# Altium PCB PCB1.PcbDoc (part 4 of 4)
Units mil, origin at the board's own origin, x right, y up, seen from the top; angles counter-clockwise.
Board outline 5315 x 3730 mil, 2 copper layers (Top Layer, Bottom Layer); 713 components, 554 nets, 2458 pads, 0 vias.
Unrouted connection lines stored in the file: 1728.
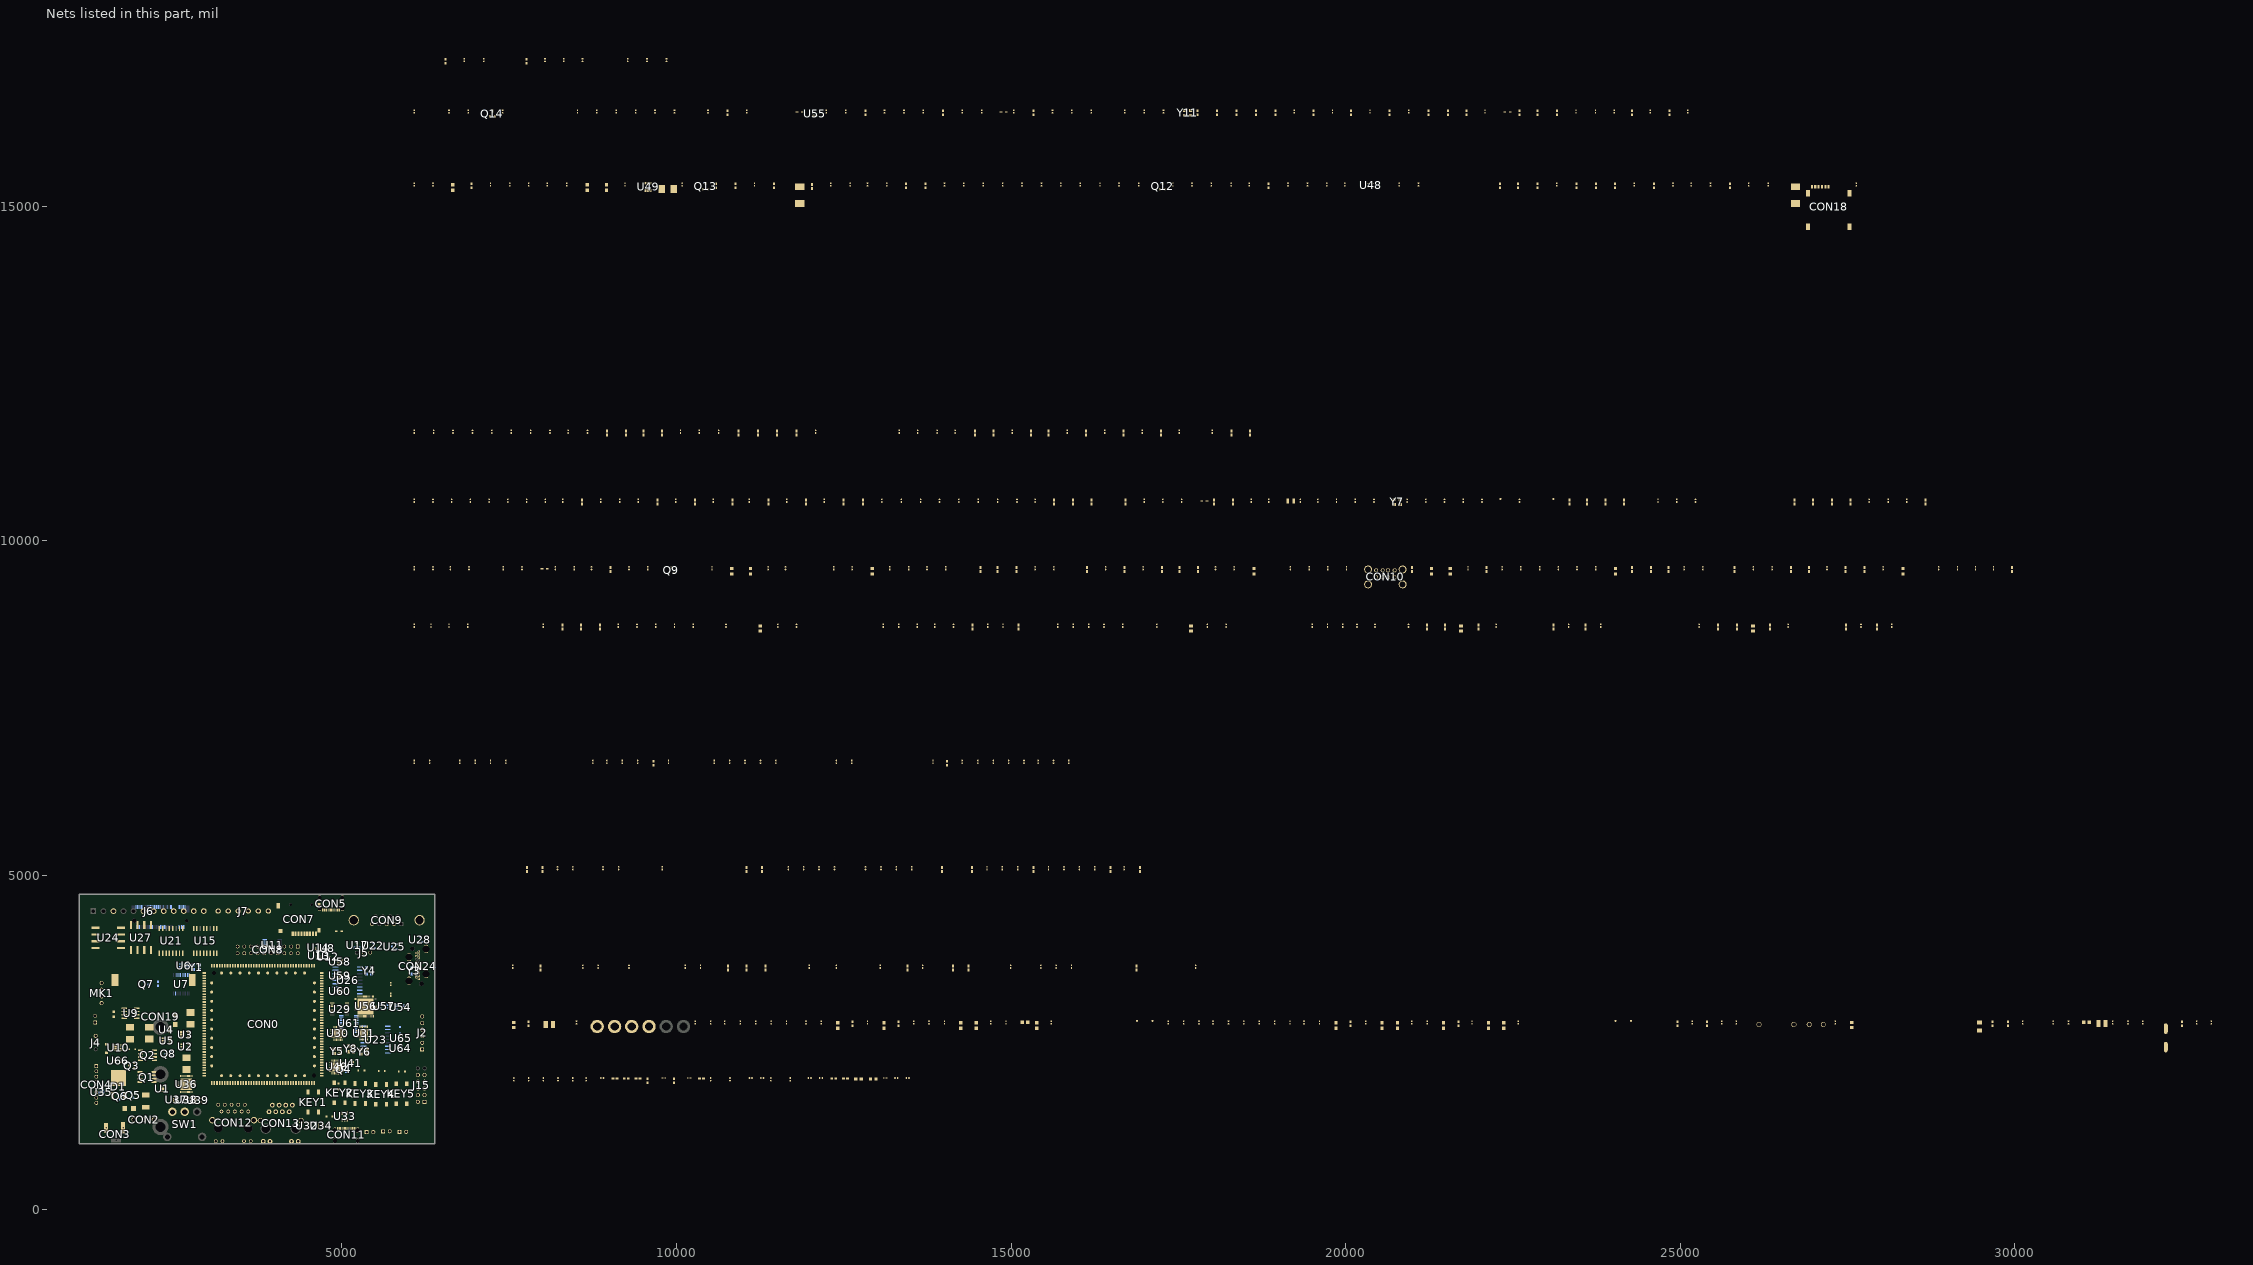
[diagram p3: the nets of this part, all layers, seen from the top]

## Part data (continued)
R220: library part R_1, "0R,±1%,R0402,≥1/16W", Manufacturer Character=中国大陆, Operation Temperature（℃）=-55~155℃, As-Welded=/, PCB Footprint=R0402, room="USB HUB"
R221: library part "R 1%", "贴片电阻,5.1K,±1%,1/16W", Manufacturer Character=中国大陆, Operation Temperature（℃）=-55~155℃, Temperature=-55~125℃, As-Welded=/, Characteristic="0402 1/16W +/-1%", CLASS=DISCRETE, PCB Footprint=R0402, room=JTAG
R222 R228 R229 R231 R232 R234 R235 R236 R237 R238 R239: library part R_1, "贴片电阻,4.7K,±1%,1/16W", Manufacturer Character=中国大陆, Operation Temperature（℃）=-55~155℃, PCB Footprint=R0402, room=DRDUSB
  R222 R231 R232 R234 R238 R239: As-Welded=/
  R228 R229 R235 R236 R237: As-Welded=DNP
R223 R224 R225 R226: library part R_0, "贴片电阻,49.9R,±1%,1/10W", Manufacturer Character=中国大陆, Operation Temperature（℃）=-40~85℃, Temperature=-55~155℃, As-Welded=DNP, PCB Footprint=R0603, room=ecat1
R227: library part R_0, "贴片电阻,0R,±1%,1/16W", Manufacturer Character=中国大陆, Operation Temperature（℃）=-55~155℃, As-Welded=DNP, PCB Footprint=R0402, room=ecat1, Temperature=-55~155℃
R230 R233: library part R_0, "贴片电阻,330R,±1%,1/16W", Manufacturer Character=中国大陆, Operation Temperature（℃）=-55~155℃, Temperature=–55~155℃, As-Welded=/, PCB Footprint=R0402, room=ecat1
R290: library part "R 1%", "贴片电阻,1K,±1%,1/16W", Manufacturer Character=中国大陆, Operation Temperature（℃）=-55~155℃, As-Welded=/, Characteristic="0402 1/16W +/-1%", CLASS=DISCRETE, PCB Footprint=R0402, Temperature=-55~155℃
R308 R309: library part Resistor_Dup3, "贴片电阻,49.9R,±1%,1/10W", Manufacturer Character=中国大陆, Operation Temperature（℃）=-55~125℃, As-Welded=/, CLASS=DISCRETE, PCB Footprint=R0603
R394 R395: library part 10_R_0, "贴片电阻,10K,±1%,1/16W", Manufacturer Character=中国大陆, Operation Temperature（℃）=-55~155℃, As-Welded=/, CLASS=DISCRETE, Part Field 1=0, Part Field 2=0, PCB Footprint=R0402, Temperature=-55~155℃
R399: library part Resistor_Dup3, "贴片电阻,6.04K,±1%,1/16W", Manufacturer Character=中国大陆, Operation Temperature（℃）=-55~155℃, As-Welded=/, CLASS=DISCRETE, PCB Footprint=R0402
R405: library part Resistor_Dup3, "贴片电阻,33R,±1%,1/16W", Manufacturer Character=中国大陆, Operation Temperature（℃）=-55~155℃, As-Welded=/, CLASS=DISCRETE, PCB Footprint=R0402
R408 R409 R410 R413: library part Resistor_Dup1, "贴片电阻,10K,±1%,1/16W", Manufacturer Character=中国大陆, Operation Temperature（℃）=-55~155℃, CLASS=DISCRETE, PCB Footprint=R0402, Temperature=-55~155℃
  R408: As-Welded=/
  R409 R410 R413: As-Welded=DNP
R411 R412: library part Resistor_Dup1, "贴片电阻,22R,±1%,1/16W", Manufacturer Character=中国大陆, Operation Temperature（℃）=-55~155℃, As-Welded=/, CLASS=DISCRETE, PCB Footprint=R0402, Temperature=-55~155℃
R414: library part Resistor_Dup1, "贴片电阻,0R,±1%,1/10W", Manufacturer Character=中国大陆, Operation Temperature（℃）=-55~155℃, As-Welded=/, CLASS=DISCRETE, PCB Footprint=R0603, Temperature=-55~155℃
R415: library part Resistor_Dup3, "0R,±1%,R0603,≥1/10W", Manufacturer Character=中国大陆, Operation Temperature（℃）=-55~155℃, Temperature=-55~125℃, As-Welded=/, CLASS=DISCRETE, PCB Footprint=R0603, room=RGMII1
R419: library part Resistor_Dup3, "贴片电阻,0R,±1%,1/10W", Manufacturer Character=中国大陆, Operation Temperature（℃）=-55~155℃, Temperature=-55~125℃, As-Welded=DNP, CLASS=DISCRETE, PCB Footprint=R0603, room=RGMII1
R440: library part Resistor, "贴片电阻,10K,±1%,1/16W", Manufacturer Character=中国大陆, Operation Temperature（℃）=-55~155℃, As-Welded=/, CLASS=DISCRETE, PCB Footprint=R0402, room=eth0, Temperature=-55~155℃
SW1: library part switch_7, "拨动开关，2档3脚侧拨开关,黑色,90度,短柄", Manufacturer=广东星坤科技股份有限公司（XKB）, Manufacturer Character=中国大陆, As-Welded=/, Manufacturer PartNumber=SS-12D11L5, PCB Footprint=sw-126_76
TP1 TP2 TP3 TP4: library part TP-S40, "黑色直插测试柱", Manufacturer=深圳市保定五金塑胶有限公司, Manufacturer Character=中国大陆, Manufacturer PartNumber=TP-5011, Operation Temperature（℃）=-40~85℃, As-Welded=/, Characteristic="Test point,diameter=1.0mm", PCB Footprint=TP_DIP
TP5 TP6 TP7 TP8: library part TP-S40, Manufacturer Character=中国大陆, As-Welded=/, Characteristic="Test point,diameter=1.0mm", PCB Footprint=TP30
TP9 TP10: library part "T POINT R", Manufacturer Character=中国大陆, AGILE_PN=510-75618, As-Welded=/, CAD_APPROVED=Yes, CLASS=IC, Height=0.1MM, PCB Footprint=TP30
U1: "MOSFET,P沟道,VDSS=-30V,VGSS=±25V,ID=-13A,PD=3.8W,VGS(th)=-3V", Manufacturer=上海韦尔半导体股份有限公司（WILLSEMI）, Manufacturer Character=中国大陆, Operation Temperature（℃）=-40~85℃, As-Welded=/, Manufacturer PartNumber=WS3222D-8/TR, PCB Footprint=DFN2X2-8L, Temperature=-40~85℃
U2 U3 U4 U49: library part WD1304E30, "DC/DC,Buck,Vin:4.5V~17V,Vout:0.6V~6V,3A,1路", Manufacturer=上海芯强微电子股份有限公司（Ecranic）, Manufacturer Character=中国大陆, Operation Temperature（℃）=-40~85℃, As-Welded=/, Manufacturer PartNumber=EC2232E, PCB Footprint=SOT-23-6L, Temperature=-40~85℃
U5: library part WD1304E30_0, "DC/DC,Buck,Vin:4.5V~17V,Vout:0.6V~6V,3A,1路", Manufacturer=上海芯强微电子股份有限公司（Ecranic）, Manufacturer Character=中国大陆, Operation Temperature（℃）=-40~85℃, Temperature=-40~125℃, As-Welded=/, Manufacturer PartNumber=EC2232E, PCB Footprint=SOT-23-6L
U6 U54: library part TXS0102DCUR, "2位双向电平转换器", Manufacturer=江苏润石科技有限公司（RUNIC）, Manufacturer Character=中国大陆, Operation Temperature（℃）=-40~85℃, As-Welded=/, Manufacturer PartNumber=RS0102YVS8, PCB Footprint=SOP8-20-91, Temperature=-40~85℃
U7: "USB转UART芯片", Manufacturer=南京沁恒微电子股份有限公司（WCH）, Manufacturer Character=中国大陆, Operation Temperature（℃）=-40~85℃, As-Welded=/, Manufacturer PartNumber=CH340T, PCB Footprint=TSSOP-20, Temperature=-40~85℃
U8 U12 U13 U14 U48 U64 U65: library part PRTR5V0U4Y_0, "ESD二极管,VRWM=5V,VBR=6V,四组,单向,8KV,15KV", Manufacturer=上海雷卯电子科技有限公司（Leiditech）, Manufacturer Character=中国大陆, Manufacturer Part Number=PRTR5V0U4Y, Operation Temperature（℃）=-55~125℃, Temperature=-40~85℃, As-Welded=/, Manufacturer PartNumber=LC0504F, PCB Footprint=SOT363, room=SD
U9: library part IC_MCP79410_0, "RTC芯片", Manufacturer=广东华冠半导体有限公司（HGSEMI）, Manufacturer Character=中国大陆, Operation Temperature（℃）=-40~85℃, As-Welded=/, Manufacturer PartNumber=DS1307ZM/TR, PCB Footprint=SOIC8_D8, Temperature=-40~85℃
U10: library part MAX637x, "低电平有效开漏输出,2.5V-5.5V,-40~125℃", Manufacturer="Maxim Integrated（美国美信）", Manufacturer Character=国外, Operation Temperature（℃）=-40~125℃, As-Welded=/, Manufacturer PartNumber=MAX6369KA+T, PCB Footprint=sot23_8, Temperature=-40~125℃
U11: library part TS3A5018DR_2, "4路模拟开关芯片", Manufacturer=江苏润石科技有限公司（RUNIC）, Manufacturer Character=中国大陆, Operation Temperature（℃）=-40~85℃, As-Welded=/, Manufacturer PartNumber=RS2233YTSS16, PCB Footprint=TSSOP16, room=JTAG_DSP, Temperature=-40~85℃
U15 U21: library part ISO3082, "CA-IS308x 隔离 5kV 全/半双工 RS485 收发器", Manufacturer=上海川土微电子有限公司（Chipanalog）, Manufacturer Character=中国大陆, Operation Temperature（℃）=-40~125℃, As-Welded=/, Manufacturer PartNumber=CA-IS3082WX, PCB Footprint=SOIC16, room=6, Temperature=-40~125℃
U17 U22 U25 U28: library part PSM712, "TVS二极管", Manufacturer=派克微电子（深圳）有限公司, Manufacturer Character=中国大陆, Operation Temperature（℃）=-55~125℃, As-Welded=/, Manufacturer PartNumber=PESD2CANFD24V-K, PCB Footprint=SOT23-3
U23: library part MCP2510/2515_3, "带 SPI 接口的独立 CAN 控制器", Manufacturer=信路达信息技术（厦门）有限（xinluda）, Manufacturer Character=中国大陆, Operation Temperature（℃）=-40~85℃, As-Welded=/, Manufacturer PartNumber=XL2515, PCB Footprint=SOIC18, Temperature=-40~85℃
U24 U27: library part ISO1050, "隔离CAN收发器", Manufacturer=苏州纳芯微电子股份有限公司（NOVOSENSE）, Manufacturer Character=中国大陆, Operation Temperature（℃）=-40~125℃, As-Welded=/, Manufacturer PartNumber=NSI1050-DDBR, PCB Footprint=SOP8, Temperature=-40~125℃
U26: library part MCP2510/2515_2, "带 SPI 接口的独立 CAN 控制器", Manufacturer=信路达信息技术（厦门）有限（xinluda）, Manufacturer Character=中国大陆, Operation Temperature（℃）=-40~85℃, As-Welded=/, Manufacturer PartNumber=XL2515, PCB Footprint=SOIC18, Temperature=-40~85℃
U29: library part MAX232A_0, "RS232收发器", Manufacturer=江苏芯力特电子科技有限公司（SIT）, Manufacturer Character=中国大陆, Operation Temperature（℃）=-40~85℃, As-Welded=/, Manufacturer PartNumber=SIT3232EEUE, PCB Footprint=TSSOP16_PW16, room=RS232, Temperature=-40~85℃
U30 U31: library part GL852GT_1, "USB HUB控制器", Manufacturer=南京沁恒微电子股份有限公司（WCH）, Manufacturer Character=中国大陆, Operation Temperature（℃）=-40~85℃, As-Welded=/, Manufacturer PartNumber=CH334H, PCB Footprint=QFN28_5x5, room="USB HUB", Temperature=-40~85℃
U32 U34: library part PRTR5V0U4Y, "ESD二极管,VRWM=5V,VBR=6V,四组,单向,8KV,15KV", Manufacturer=上海雷卯电子科技有限公司（Leiditech）, Manufacturer Character=中国大陆, Operation Temperature（℃）=-55~125℃, Temperature=-40~85℃, As-Welded=/, Manufacturer PartNumber=LC0504F, PCB Footprint=SOT363, room=DRDUSB
U33: library part TPS2041BDGN_0, "限流配电开关,2.5V~5.5V,1.4A", Manufacturer=上海韦尔半导体股份有限公司（WILLSEMI）, Manufacturer Character=中国大陆, Operation Temperature（℃）=-40~85℃, As-Welded=/, Manufacturer PartNumber=WS4612EBB-5/TR, PCB Footprint=SOT23-5, room=DRDUSB, Temperature=-40~85℃
U35: library part TPS54286PWP_2, "USB Type-C配置通道适配器芯片", Manufacturer=上海韦尔半导体股份有限公司（WILLSEMI）, Manufacturer Character=中国大陆, Manufacturer PartNumber=WUSB3801Q-12/TR, Operation Temperature（℃）=-40~125℃, As-Welded=DNP, PCB Footprint=QFN1616-12L
U36: library part YT8521S, "以太网收发器，RGMII/SGMII", Manufacturer=苏州裕太微电子有限公司（Motorcomm）, Manufacturer Character=中国大陆, Operation Temperature（℃）=-40~85℃, Temperature=-40~85, As-Welded=/, Manufacturer PartNumber=YT8521SH-CA, PCB Footprint=QFN48
U37 U38 U41: library part SU099PGTR, "4通道超低电容瞬态抑制器", Manufacturer=上海芯导电子科技有限公司（Prisemi）, Manufacturer Character=中国大陆, Operation Temperature（℃）=-40~85℃, Temperature=-55~150, As-Welded=/, Manufacturer PartNumber=PESDALC10N5VU, PCB Footprint=DFN-10-2510
U39: library part 74LVC1G08, "1个两输入与门", Manufacturer=圣邦微电子股份有限公司（SGMICRO）, Manufacturer Character=中国大陆, Operation Temperature（℃）=-40~85℃, As-Welded=/, Manufacturer PartNumber=SGM7SZ08YC5G/TR, PCB Footprint=SC70-5-43M, Temperature=-40~85℃
U40: library part YT8512H_1, "以太网收发器，MII/RMII", Manufacturer=苏州裕太微电子有限公司（Motorcomm）, Manufacturer Character=中国大陆, Operation Temperature（℃）=-40~85℃, As-Welded=/, Manufacturer PartNumber=YT8512H, PCB Footprint=QFN32, Temperature=-40~85℃
U55: library part DIO1647_0, "3.5GHz, 十单刀双掷MIPI 开关", Manufacturer=江苏帝奥微电子股份有限公司, Manufacturer Character=中国大陆, Manufacturer PartNumber=DIO1647WL36, Temperature=-40~85℃, As-Welded=/, PCB Footprint=WLCSP-36-0d4mm
U56: library part LT8912B_QFN64_0, "MIPI转HDMI/LVDS", Manufacturer=龙迅半导体（合肥）股份有限公司, Manufacturer Character=中国大陆, Operation Temperature（℃）=-40~85℃, Part Number=566-00-3037, As-Welded=/, Manufacturer PartNumber=LT8912B, Part Description=LT8912B,QFN64, Part Status="On Hand", Part Type=LontiumIC, PCB Footprint=QFN64_LT8912B, Standard PCB Footprint=QFN64, Temperature=-40~85℃
U57: library part TXS0102DCUR, "2位双向电平转换器", Manufacturer=江苏润石科技有限公司（RUNIC）, Manufacturer Character=中国大陆, Manufacturer PartNumber=RS0102YVS8, Operation Temperature（℃）=-40~85℃, As-Welded=DNP, PCB Footprint=SOP8-20-91, Temperature=-40~85℃
U58 U59 U60: library part RCLAMP0524P, "4通道超低电容瞬态抑制器", Manufacturer=上海芯导电子科技有限公司（Prisemi）, Manufacturer Character=中国大陆, Operation Temperature（℃）=-40~85℃, Temperature=-55~125℃, As-Welded=/, Manufacturer PartNumber=PESDALC10N5VU, PCB Footprint=DFN-10-2510
U61: library part XL9555_0, "拓展IO芯片", Manufacturer=信路达信息技术（厦门）有限公司（xinluda）, Manufacturer Character=中国大陆, Operation Temperature（℃）=-40~85℃, As-Welded=/, Manufacturer PartNumber=XL9555, PCB Footprint=TSSOP24, Temperature=-40~85℃
U66: library part 1A_SN74LVC1G07, "1个1位缓冲器", Manufacturer=江苏润石科技有限公司（RUNIC）, Manufacturer Character=中国大陆, Mfr=TI, MfrNum=SN74LVC1G07DCK, Operation Temperature（℃）=-40~125℃, TIIntPartnumber=1A0269, Cost10K=0.04, Cost100=1.11, DescriptiveText="Driver Open Drain output", Manufacturer PartNumber=RS1G07XC5, PartName=SN74LVC1G07DCK, PCB Footprint=smd_dck5pin, Remark=单路开漏输出缓冲器/驱动器, Temperature=-40~125℃, Vendor=Digikey
Y1 Y5 Y6: library part CRYSTAL, "四脚无源晶振,12MHz,±10ppm,12pF,100Ω,±30ppm", Manufacturer=深圳市星通时频电子有限公司公司（JSCJ）, Manufacturer Character=中国大陆, Operation Temperature（℃）=-40~85℃, As-Welded=/, Manufacturer PartNumber=S3B12.000F1210F30, PCB Footprint=SMD_3225, Temperature=-40~85℃
  Y5 Y6: room="USB HUB"
Y2: library part CRYS_32_768KHz_SMD, "两脚无源晶振,32.768KHz,±20ppm,12.5pF,80KΩ,±20ppm", Manufacturer=湖北泰晶电子科技股份有限公司（TKD）, Manufacturer Character=中国大陆, Mfr=Epson, MfrNum=MC-30632.7680k-A, Operation Temperature（℃）=-40~85℃, PartName=Crystal32.768KHzMC306, TIIntPartnumber=1Y0029, As-Welded=/, Cost10K=0.338, Cost100=0.41, Manufacturer PartNumber=SF20WK32768D31T007, PCB Footprint=smd, Temperature=-40~85℃, TN=tbd, Vendor=Digikey
Y3 Y4: library part CRYSTAL, "四脚无源晶振,16MHz,±10ppm,12pF,60Ω,±30ppm", Manufacturer=深圳市星通时频电子有限公司公司（JSCJ）, Manufacturer Character=中国大陆, Operation Temperature（℃）=-40~85℃, As-Welded=/, Manufacturer PartNumber=S3B16.000F1210F30, PCB Footprint=SMD_3225, Temperature=-40~85℃
Y7: library part "CRYSTAL-4 PIN", "四脚无源晶振,25MHz,±10ppm,12pF,30Ω,±30ppm", Manufacturer=深圳市星通时频电子有限公司公司（JSCJ）, Manufacturer Character=中国大陆, Operation Temperature（℃）=-40~85℃, Temperature=-40~85, As-Welded=/, Manufacturer PartNumber=S3B25.000F1210F30, PCB Footprint=SMD_3225
Y8: library part "CRYSTAL-4 PIN", "四脚无源晶振,25MHz,±10ppm,12pF,30Ω,±30ppm", Manufacturer=深圳市星通时频电子有限公司公司（JSCJ）, Manufacturer Character=中国大陆, Operation Temperature（℃）=-40~85℃, As-Welded=/, Manufacturer PartNumber=S3B25.000F1210F30, PCB Footprint=SMD_3225, Temperature=-40~85℃
Y11: library part CRYS-4PIN, "四脚无源晶振,25MHz,±10ppm,12pF,30Ω,±30ppm", Manufacturer=深圳市星通时频电子有限公司公司（JSCJ）, Manufacturer Character=中国大陆, Operation Temperature（℃）=-40~85℃, As-Welded=/, Manufacturer PartNumber=S3B25.000F1210F30, PCB Footprint=SMD_3225, Temperature=-40~85℃

## Nets (pads, with @x,y where several pads share a name; then routed paths per layer and width w, separated by ;. In a path a pad name is that pad's centre, name@x,y a point inside that pad or via, vN(x,y) a via of type N, cw(c..) or ccw(c..) an arc to the next point about the centre after c; other vN are vias at no path point)
1E1/SARADC1_IN7: CON0.200
1F1/SARADC1_IN0: CON0.197
1F2/SARADC1_IN2: CON0.198
1H1/SARADC1_IN4: CON0.199
1J1/SARADC1_IN1: CON0.161
1J2/SARADC1_IN3: CON0.162
1J14/RMII_MDC/3V3: R421.2 U40.22
1J15/RMII_RXER/3V3: CON0.100 U40.28
1K1/SARADC1_IN6: CON0.164
1L1/UART2_RX_M1/RS232/3V3: CON0.126 U29.12
1L2/SARADC1_IN5: CON0.163
1M1/UART2_TX_M1/RS232/3V3: CON0.125 U29.11
1M2/PCIE20_PERSTN_M1/3V3: CON0.136 R302.1
1P3/MIPI_CSI_RX1_CLK1P: CON0.14
1P7/MIPI_CSI_RX0_CLK1P: CON0.30
1P12/RESETn/3V3: R135.2 R149.2 R440.1 U39.2 U66.4
1P12/RESETn/PU/3V3: CON0.118 D9.1 J4.2 R46.1 U66.2
1P14/USB30_OTG0_VBUSDET/3V3: C141.1 CON0.69 R164.1 R166.2
1P15/USB30_OTG0_ID/1V8: CON0.70 D10.2 R167.2 U35.9
1R3/MIPI_CSI_RX1_CLK1N: CON0.15
1R7/MIPI_CSI_RX0_CLK1N: CON0.31
1R11/CAN1_RX_M1/3V3: CON0.91
AA1/RGMII_TXD0_M0/3V3: CON0.6 U36.19
AA2/RGMII_TXD1_M0/3V3: CON0.5 U36.18
AA3/RGMII_TXEN_M0/3V3: CON0.2 U36.20
AA25/RMII_TXEN/3V3: CON0.102 U40.20
AB2/RGMII_TXD3_M0/3V3: CON0.3 U36.16
AB3/RGMII_TXD2_M0/3V3: CON0.4 U36.17
AB26/PCIE20_RXDP: CON0.66 R298.1
AB27/PCIE20_RXDN: CON0.67 R297.1
AC1/RGMII_MDC_M0/3V3: R420.2 U36.14
AC2/RGMII_MDIO_M0/3V3: R179.2 R454.2 U36.15
AC26/PCIE20_REFCLKP: R8.2 R306.2
AC27/PCIE20_REFCLKN: R9.2 R304.2
AD1/MIPI_CSI_RX1_D3P: CON0.18
AD2/MIPI_CSI_RX1_D3N: CON0.19
AD26/PCIE20_TXDP: C255.2 CON0.60
AD27/PCIE20_TXDN: C254.2 CON0.61
AE1/MIPI_CSI_RX1_D2P: CON0.16
AE15/GPIO0_B6_d/POWER_EN/3V3: CON0.93 CON4.1 D24.1 R446.2
AE16/SPI0_CLK_M0/3V3: CON0.75 J2.5 R60.2
AE16/SPI0_CLK_M0/Touch/3V3: R60.1
AE18/SPI0_MISO_M0/3V3: CON0.74 J2.4 R59.2
AE18/SPI0_MISO_M0/Touch/3V3: R59.1
AE19/CAN0_RX_M2/3V3: CON0.89
AE20/UART0_TX_M0/Debug/3V3: CON0.82 U6.4
AE24/GPIO0_A0_d/KEY/3V3: CON0.96 R61.1
AE26/USB20_HOST1_DM: CON0.55 U30.1
AE27/USB20_HOST1_DP: CON0.54 U30.2
AF1/MIPI_CSI_RX1_D2N: CON0.17
AF2/MIPI_CSI_RX1_CLK0P: CON0.23
AF3/MIPI_CSI_RX1_D1P: CON0.21
AF4/MIPI_CSI_RX1_D0P: CON0.25
AF5/MIPI_CSI_RX0_D3P: CON0.32
AF6/MIPI_CSI_RX0_D2P: CON0.35
AF7/MIPI_CSI_RX0_CLK0P: CON0.39
AF8/MIPI_CSI_RX0_D1P: CON0.37
AF9/MIPI_CSI_RX0_D0P: CON0.28
AF10/MIPI_DSI_TX_D3N: U55.B5
AF10/MIPI_DSI_TX_D3N/LVDS_TX_D3N: CON0.42
AF11/MIPI_DSI_TX_D2P: U55.C6
AF11/MIPI_DSI_TX_D2P/LVDS_TX_D2P: CON0.46
AF12/MIPI_DSI_TX_CLKN: U55.F5
AF12/MIPI_DSI_TX_CLKN/LVDS_TX_CLKN: CON0.49
AF13/MIPI_DSI_TX_D1P: U55.D6
AF13/MIPI_DSI_TX_D1P/LVDS_TX_D1P: CON0.43
AF14/MIPI_DSI_TX_D0N: U55.E5
AF14/MIPI_DSI_TX_D0N/LVDS_TX_D0N: CON0.52
AF15/PWM4_M0/FAN_EN/3V3: CON0.94 R97.1
AF16/GPIO0_B5_d/POWER_OFF/3V3: CON0.92 CON4.2 D23.1
AF17/CAN1_TX_M1/3V3: CON0.90
AF19/CAN0_TX_M2/3V3: CON0.88
AF20/UART0_RX_M0/Debug/3V3: CON0.81 U6.5
AF21/GPIO0_B0_d/EXIO_INTn/3V3: CON0.132 R408.2 U61.1
AF26/USB30_OTG0_DM: CON0.58 CON11.A7 CON11.B7 U34.1
AF27/USB30_OTG0_DP: CON0.57 CON11.A6 CON11.B6 U34.6
AG2/MIPI_CSI_RX1_CLK0N: CON0.24
AG3/MIPI_CSI_RX1_D1N: CON0.22
AG4/MIPI_CSI_RX1_D0N: CON0.26
AG5/MIPI_CSI_RX0_D3N: CON0.33
AG6/MIPI_CSI_RX0_D2N: CON0.36
AG7/MIPI_CSI_RX0_CLK0N: CON0.40
AG8/MIPI_CSI_RX0_D1N: CON0.38
AG9/MIPI_CSI_RX0_D0N: CON0.29
AG10/MIPI_DSI_TX_D3P: U55.B6
AG10/MIPI_DSI_TX_D3P/LVDS_TX_D3P: CON0.41
AG11/MIPI_DSI_TX_D2N: U55.C5
AG11/MIPI_DSI_TX_D2N/LVDS_TX_D2N: CON0.47
AG12/MIPI_DSI_TX_CLKP: U55.F6
AG12/MIPI_DSI_TX_CLKP/LVDS_TX_CLKP: CON0.48
AG13/MIPI_DSI_TX_D1N: U55.D5
AG13/MIPI_DSI_TX_D1N/LVDS_TX_D1N: CON0.44
AG14/MIPI_DSI_TX_D0P: U55.E6
AG14/MIPI_DSI_TX_D0P/LVDS_TX_D0P: CON0.51
AG17/SPI0_CSN0_M0/3V3: CON0.72 J2.2 R56.2
AG17/SPI0_CSN0_M0/Touch/3V3: R56.1
AG19/SPI0_MOSI_M0/3V3: CON0.73 J2.3 R58.2
AG19/SPI0_MOSI_M0/Touch/3V3: R58.1
AVDD1/DVDD1_3V3: C120.1 C121.1 C122.1 C123.1 FB8.1 U30.5 U30.9
AVDD2/DVDD2_3V3: C134.1 C135.1 C136.1 C137.1 FB11.1 U31.5 U31.9
AVDD_3V3_ETH1: C169.1 C170.1 C171.1 FB14.2 U40.7
AVDDL_REG_ETH1: C177.1 C178.1 U40.2
CAN2_H: J6.7 R121.1 U24.7 U25.2
CAN2_L: J6.8 R121.2 U24.6 U25.1
CAN3_H: J6.10 R129.1 U27.7 U28.2
CAN3_L: J6.11 R129.2 U27.6 U28.1
CH334H1_V5: C118.1 R136.1 R137.1 U30.27
CH334H2_V5: C132.1 R150.1 R151.1 U31.27
CH340_RXD: U6.1 U7.4
CH340_TXD: U6.8 U7.3
CLKN: U55.F1 U56.8
CLKP: U55.F2 U56.7
D0N: U55.E1 U56.2
D0P: U55.E2 U56.1
D1/CAM_CLK3_OUT/3V3: CON0.151
D1N: U55.D1 U56.4
D1P: U55.D2 U56.3
D2N: U55.C1 U56.10
D2P: U55.C2 U56.9
D3/UART9_RX_M1/BT1/BT2/3V3: CON0.128
D3N: U55.B1 U56.12
D3P: U55.B2 U56.11
D25/SARADC0_IN4: CON0.193
D26/SARADC0_BOOT/Maskrom: CON0.121 R54.1
DBGACK: CON8.19 R91.1
DBGRQ: CON8.17 R92.1
DEVSLP/PU/1V8: CON19.38 Q12.3
DSCL_TX0: CON24.15 R401.1 U57.1 U59.1 U59.10
DSDA_TX0: CON24.16 R400.1 U57.8 U59.4 U59.7
DVDDL_REG_ETH1: C175.1 C176.1 U40.29
E1/UART9_TX_M1/BT1/BT2/3V3: CON0.127
E2/UART3_RTSN_M1/RS485_RD/3V3: CON0.131 U15.4 U15.5
E25/SARADC0_IN2: CON0.191
E26/SARADC0_IN5: CON0.194
E27/SARADC0_IN6: CON0.195
EGND: C51.1 CON2.3 CON5.1 CON5.2 CON5.3 CON5.4 CON9.10 CON9.11 CON10.9 CON10.10 CON10.11 CON10.12 CON11.1 CON11.2 CON11.3 CON11.4 CON12.10 CON12.17 CON12.18 CON13.7 CON13.8 CON13.15 CON13.16 CON24.MTG1 CON24.MTG2 CON24.MTG3 CON24.MTG4 FB12.2 H1.1 H2.1 H3.1 H4.1 R45.1
ETH0_CFG_MODE0: R187.2 R200.1 R213.2 U36.25
ETH0_CFG_MODE1: R188.2 R201.1 R214.2 U36.24
ETH0_CFG_MODE2: R189.2 R202.1 R215.2 U36.23
ETH0_LED0/PHYAD0: R199.1 R212.2 U36.35
ETH0_LED1/CFG_LDO0: R186.1 R206.1 R216.2 U36.36
ETH0_LED2/CFG_LDO1: R180.1 R207.1 R217.2 U36.37
ETH0_PHYAD1: R191.2 R198.1 R211.2 U36.28
ETH0_PHYAD2: R190.2 R205.1 R210.2 U36.27
ETH0_RXD0/RXDLY: R185.2 R203.1 R218.2 U36.26
ETH1_RDN: C183.1 CON13.6 R226.2 U40.6 U41.5 U41.6
ETH1_RDP: C182.1 CON13.3 R225.2 U40.5 U41.4 U41.7
ETH1_TDN: C181.1 CON13.2 R224.2 U40.4 U41.2 U41.9
ETH1_TDP: C180.1 CON13.1 R223.2 U40.3 U41.1 U41.10
F2/CAM_CLK2_OUT/3V3: CON0.149
F25/SARADC0_IN7: CON0.196
F26/SARADC0_IN1/KEY/RECOVERY: CON0.122 R55.1
G1/CAM_CLK1_OUT_M0/3V3: CON0.150
G2/UART3_TX_M1/RS485/3V3: CON0.129 U15.6
G26/SARADC0_IN3: CON0.192
GND: C1.2 C2.2 C5.1 C6.1 C7.2 C8.2 C9.2 C10.2 C11.2 C13.2 C14.1 C15.2 C16.2 C17.2 C18.2 C19.2 C23.2 C24.2 C26.2 C27.2 C28.2 C29.2 C30.2 C31.2 C32.2 C33.2 C34.2 C35.2 C37.2 C38.2 C39.2 C41.2 C42.2 C43.2 C44.2 C46.2 C47.2 C48.2 C49.2 C50.2 C51.2 C52.2 C53.2 C54.2 C55.2 C56.2 C57.2 C58.2 C59.2 C60.2 C61.2 C62.2 C63.1 C64.2 C65.2 C66.2 C67.1 C68.2 C69.2 C70.2 C71.2 C72.2 C73.2 C74.2 C75.2 C76.2 C77.2 C78.2 C85.2 C86.2 C89.2 C90.2 C92.2 C93.2 C94.2 C95.2 C96.2 C99.2 C100.2 C102.2 C103.2 C104.2 C105.2 C106.2 C107.1 C108.1 C111.2 C112.2 C113.2 C114.2 C115.2 C116.2 C117.1 C118.2 C119.1 C120.2 C121.2 C122.2 C123.2 C124.2 C125.2 C126.2 C127.2 C128.2 C129.2 C130.2 C131.1 C132.2 C133.1 C134.2 C135.2 C136.2 C137.2 C138.2 C139.2 C140.2 C141.2 C142.2 C143.2 C144.2 C145.1 C146.1 C147.1 C148.1 C149.1 C150.2 C151.2 C152.2 C153.2 C154.2 C155.2 C156.2 C157.2 C158.2 C159.2 C160.2 C161.2 C162.2 C163.2 C164.2 C165.2 C166.2 C167.1 C168.1 C169.2 C170.2 C171.2 C172.2 C173.2 C174.2 C175.2 C176.2 C177.2 C178.2 C179.2 C180.2 C181.2 C182.2 C183.2 C184.2 C243.1 C244.2 C245.2 C246.2 C247.2 C248.2 C249.2 C250.1 C251.1 C252.1 C253.2 C256.1 C257.2 C258.2 C259.2 C260.2 C261.2 C262.2 C264.2 C265.2 C266.2 C268.2 C269.2 C270.2 C308.2 C309.2 C310.2 C311.2 C312.2 C313.2 C314.2 C315.2 C316.2 C317.2 C318.2 C319.2 C320.2 C321.2 C322.2 C323.2 C324.2 C325.2 C326.2 C327.1 C328.1 C329.2 C330.2 C331.2 C332.2 C334.2 C335.2 C336.2 C337.2 CON0.13 CON0.20 CON0.27 CON0.34 CON0.45 CON0.50 CON0.53 CON0.56 CON0.59 CON0.62 CON0.65 CON0.68 CON0.76 CON0.87 CON0.97 CON0.108 CON0.115 CON0.119 CON0.123 CON0.133 CON0.139 CON0.147 CON0.152 CON0.158 CON0.165 CON0.179 CON2.2 CON3.2 CON4.3 CON4.6 CON5.A1 CON5.A12 CON5.B1 CON5.B12 CON6.2 CON7.6 CON7.10 CON7.11 CON7.12 CON7.13 CON8.4 CON8.6 CON8.8 CON8.10 CON8.12 CON8.14 CON8.16 CON8.18 CON8.20 CON9.5 CON10.4 CON10.8 CON11.A1 CON11.A12 CON11.B1 CON11.B12 CON12.12 CON12.13 CON13.10 CON13.11 CON18.1 CON18.2 CON18.3 CON18.4 CON18.C5 CON19.3 CON19.5 CON19.11 CON19.27 CON19.33 CON19.39 CON19.45 CON19.51 CON19.57 CON19.71 CON19.73 CON24.2 CON24.5 CON24.8 CON24.11 CON24.17 D2.1 D3.2 D4.2 D5.2 D6.2 D7.2 D9.2 D23.2 D24.2 FB12.1 J2.6 J5.3 J15.2 KEY1.3 KEY1.4 KEY2.3 KEY2.4 KEY3.3 KEY3.4 KEY4.3 KEY4.4 KEY5.3 KEY5.4 LED0.2 MK1.1 Q5.2 Q6.2 Q8.2 Q9.2 Q12.2 Q13.2 R21.1 R22.2 R25.1 R26.2 R31.1 R32.1 R33.1 R34.1 R39.1 R40.1 R41.1 R42.1 R44.2 R45.2 R51.1 R53.1 R64.2 R65.2 R69.2 R70.2 R71.2 R84.2 R91.2 R92.2 R93.2 R94.2 R98.2 R143.2 R144.2 R146.2 R157.2 R158.2 R160.2 R165.1 R166.1 R170.1 R192.1 R210.1 R211.1 R212.1 R213.1 R214.1 R215.1 R216.1 R217.1 R218.1 R219.2 R231.1 R232.1 R237.2 R238.2 R239.2 R284.2 R287.2 R296.2 R307.2 R308.1 R309.1 R310.2 R311.2 R312.2 R315.1 R316.1 R396.1 R399.1 R406.1 R407.1 R414.2 SW1.2 TP1.1 TP2.1 TP3.1 TP4.1 U1.4 U1.9 U2.2 U3.2 U4.2 U5.2 U6.2 U7.8 U8.2 U9.4 U10.2 U11.8 U12.2 U13.2 U14.2 U15.2 U15.7 U15.8 U21.2 U21.7 U21.8 U23.9 U24.4 U26.9 U27.4 U29.15 U30.29 U31.29 U32.2 U33.2 U34.2 U35.5 U35.10 U36.49 U37.3 U37.8 U38.3 U38.8 U39.3 U40.33 U41.3 U41.8 U48.2 U49.2 U54.2 U55.A2 U56.6 U56.17 U56.23 U56.29 U56.32 U56.36 U56.42 U56.49 U56.51 U56.56 U56.65 U57.2 U58.3 U58.8 U59.3 U59.8 U60.3 U60.8 U61.2 U61.3 U61.12 U64.2 U65.2 U66.3 Y1.2 Y1.4 Y3.2 Y3.4 Y4.2 Y4.4 Y5.2 Y5.4 Y6.2 Y6.4 Y7.2 Y7.4 Y8.2 Y8.4 Y11.2 Y11.4
GNDI: C79.2 C82.1 C87.2 C88.1 C91.2 C97.2 C98.2 C101.2 J6.3 J6.6 J6.9 J6.12 J7.1 J7.4 MK1.3 R106.2 R116.2 U15.9 U15.10 U15.15 U17.3 U21.9 U21.10 U21.15 U22.3 U24.5 U25.3 U27.5 U28.3
H2/UART3_RX_M1/RS485/3V3: CON0.130 R99.2 U15.3
H3/CAM_CLK0_OUT_M0/3V3: CON0.148
HUB_USB1_DM: U30.3 U31.1
HUB_USB1_DP: U30.4 U31.2
HUB_USB2_DM: U30.6
HUB_USB2_DP: U30.7
HUB_USB3_DM: U30.12
HUB_USB3_DP: U30.13
HUB_USB4_DM: U30.15
HUB_USB4_DP: U30.16
HUB_USB5_DM: U31.3
HUB_USB5_DM_5G: CON19.9
HUB_USB5_DP: U31.4
HUB_USB5_DP_5G: CON19.7
HUB_USB6_DM: U31.6
HUB_USB6_DP: U31.7
HUB_USB7_DM: CON10.2 U31.12 U32.3
HUB_USB7_DP: CON10.3 U31.13 U32.4
HUB_USB8_DM: CON10.6 U31.15 U32.1
HUB_USB8_DP: CON10.7 U31.16 U32.6
I2C0_SCL: CON0.86 R7.1 R73.2 U9.6 U35.8
I2C0_SDA: CON0.85 R6.1 R74.2 U9.5 U35.7
I2C1_SCL: CON0.84 R4.1 R403.2 R412.1 U54.1
I2C1_SCL_1V8: R390.1 R398.1 U54.4
I2C1_SDA: CON0.83 R5.1 R402.2 R411.1 U54.8
I2C1_SDA_1V8: R391.1 R397.1 U54.5
J1/PDM_CLK0_M0/PCIE20_CLKREQN_M1/3V3: CON0.146 R15.1 R303.1
J2/I2S0_SDI0_M0/PMIC/BT/3V3: CON0.170 R14.1
K2/I2S0_MCLK_M0/PMIC/3V3: CON0.166 R10.1
K3/I2S0_SDO0_M0/PMIC/BT/3V3: CON0.169 R13.1
L1/I2S0_LRCK_M0/PMIC/BT/3V3: CON0.168 R12.1
L2/PCIE20_WAKEN_M1/3V3: CON0.135 R305.1
L3/I2S0_SCLK_M0/PMIC/BT/3V3: CON0.167 R11.1
LED0_AD0_ETH1: R228.1 R230.1 R231.2 U40.24
LED1_AD1_ETH1: R229.1 R232.2 R233.1 U40.25
LED/PU/3V3: CON19.10 LED4.2
LED_MODE0: CON0.103 R236.1 R239.1 U40.10
LT8912B_RSTN: C330.1 D21.2 R392.1 U56.64
M2/SPI2_CSN1_M0/CAN/3V3: CON0.154 U26.16
M3/SPI2_CSN0_M0/CAN/3V3: CON0.155 U23.16
MDI0_N_ETH0: CON12.3 R176.2 U36.3 U37.2 U37.9
MDI0_P_ETH0: CON12.2 R175.2 U36.2 U37.1 U37.10
MDI1_N_ETH0: CON12.7 R178.2 U36.6 U37.5 U37.6
MDI1_P_ETH0: CON12.4 R177.2 U36.5 U37.4 U37.7
MDI2_N_ETH0: CON12.6 R183.1 U36.8 U38.2 U38.9
MDI2_P_ETH0: CON12.5 R184.1 U36.7 U38.1 U38.10
MDI3_N_ETH0: CON12.9 R181.1 U36.11 U38.5 U38.6
MDI3_P_ETH0: CON12.8 R182.1 U36.10 U38.4 U38.7
MDIO: R222.2 R455.2 U40.23
MIC1_INN: C3.2 C8.1 CON0.190
MIC1_INP: C4.2 C9.1 CON0.189
MICRO_USB_DM: CON5.A7 CON5.B7 R63.2 U8.4
MICRO_USB_DP: CON5.A6 CON5.B6 R62.2 U8.6
MODE_CONTROL0: R234.1 R237.1 U40.8
N1/GPIO3_C4_d/CAN1_nINT/3V3: CON0.143 R123.1
N2/PWM14_M0/LVDS_MIPI/CSI/3V3: CON0.142
N3/SPI2_CLK_M0/CAN/3V3: C104.1 R1.2 U23.13 U26.13
N25/SDMMC0_D2/JTAG_CPU_MCU_TCK_M1/ADJ: CON0.114 U11.4
N26/SDMMC0_D3/JTAG_CPU_MCU_TMS_M1/ADJ: CON0.110 U11.7
NetC10_1: C10.1 Q1.1 Q1.2 Q1.3 R16.2 R17.1 U1.6 U1.7 U1.8
NetC12_1: C12.1 Q2.1 Q2.2 Q2.3 R18.2 U1.1 U1.2 U1.3
NetC12_2: C12.2 Q2.4 R18.1 R24.2
NetC14_2: C14.2 R17.2 R22.1 U1.5
NetC15_1: C15.1 R19.1
NetC20_1: C20.1 U2.1
NetC20_2: C20.2 L2.1 U2.6
NetC21_1: C21.1 U3.1
NetC21_2: C21.2 L1.1 U3.6
NetC22_1: C22.1 R29.1 R32.2 U2.3
NetC25_1: C25.1 R28.1 R31.2 U3.3
NetC25_2: C25.2 C27.1 C28.1 C29.1 F2.1 L1.2 R28.2
NetC36_1: C36.1 U4.1
NetC36_2: C36.2 L3.1 U4.6
NetC40_1: C40.1 R36.1 R40.2 U4.3
NetC45_1: C45.1 U5.1
NetC45_2: C45.2 L4.1 U5.6
NetC52_1: C52.1 D3.1 KEY1.1 KEY1.2 R46.2
NetC53_1: C53.1 D4.1 KEY2.1 KEY2.2 R48.2
NetC54_1: C54.1 D5.1 KEY3.1 KEY3.2 R54.2
NetC55_1: C55.1 D6.1 KEY4.1 KEY4.2 R55.2
NetC56_1: C56.1 J2.1 R415.1 R419.1
NetC57_1: C57.1 D7.1 KEY5.1 KEY5.2 R57.1 R61.2
NetC60_1: C60.1 U7.5
NetC64_1: C64.1 U7.10 Y1.1
NetC65_1: C65.1 U7.9 Y1.3
NetC67_2: C67.2 FB4.1 FB5.1 R75.1 U9.8
NetC68_1: C68.1 U9.2 Y2.1
NetC69_1: C69.1 U9.1 Y2.2
NetC75_1: C75.1 FB6.2 Q7.2 R95.1
NetC76_1: C76.1 J5.2 Q7.3
NetC79_1: C79.1 R100.2 R101.1 R102.2 U15.12 U17.2
NetC82_2: C82.2 R101.2 R104.2 R106.1 U15.13 U17.1
NetC87_1: C87.1 R112.2 R113.1 R114.2 U21.12 U22.2
NetC88_2: C88.2 R113.2 R115.2 R116.1 U21.13 U22.1
NetC92_1: C92.1 U23.8 Y3.3
NetC93_1: C93.1 U23.7 Y3.1
NetC94_1: C94.1 R118.1 R124.2 U23.17
NetC102_1: C102.1 U26.8 Y4.3
NetC103_1: C103.1 U26.7 Y4.1
NetC106_1: C106.1 R126.1 R132.2 U26.17
NetC109_1: C109.1 U29.1
NetC109_2: C109.2 U29.3
NetC110_1: C110.1 U29.4
NetC110_2: C110.2 U29.5
NetC111_1: C111.1 U29.2
NetC112_1: C112.1 U29.6
NetC113_1: C113.1 C114.1 C115.1 C116.1 FB7.1 R133.1 R134.1 U30.21
NetC117_2: C117.2 R138.1 U30.10 Y5.3
NetC119_2: C119.2 R138.2 U30.11 Y5.1
NetC127_1: C127.1 C128.1 C129.1 C130.1 FB10.1 R147.1 R148.1 U31.21
NetC131_2: C131.2 R153.1 U31.10 Y6.3
NetC133_2: C133.2 R153.2 U31.11 Y6.1
NetC143_1: C143.1 R175.1 R176.1
NetC144_1: C144.1 R177.1 R178.1
NetC145_2: C145.2 CON12.1 R174.2
NetC146_2: C146.2 U36.46 Y7.1
NetC147_2: C147.2 R181.2 R182.2
NetC148_2: C148.2 R183.2 R184.2
NetC149_2: C149.2 U36.45 Y7.3
NetC153_1: C153.1 D11.2 R194.1 U36.13 U39.4
NetC167_2: C167.2 U40.32 Y8.1
NetC168_2: C168.2 U40.31 Y8.3
NetC184_1: C184.1 CON13.4 CON13.5 R227.1
NetC254_1: C254.1 CON19.47
NetC255_1: C255.1 CON19.49
NetC256_2: C256.2 CON19.50 R299.2 R302.2 R307.1
NetC257_1: C257.1 CON19.67 Q13.3
NetC263_1: C263.1 U49.1
NetC263_2: C263.2 L8.1 U49.6
NetC267_1: C267.1 R314.1 R315.2 U49.3
NetC332_1: C332.1 FB27.2 FB28.2 R394.1 R395.1 U55.A1
NetC333_1: C333.1 U56.35
NetC340_1: C340.1 R38.1 R42.2 U5.3
NetCON0_63: CON0.63 R8.1
NetCON0_64: CON0.64 R9.1
NetCON0_98: CON0.98 R421.1
NetCON0_99: CON0.99 R455.1
NetCON0_153: CON0.153 R1.1
NetCON0_157: CON0.157 R2.1
NetCON0_159: CON0.159 R454.1
NetCON0_160: CON0.160 R420.1
NetCON0_175: CON0.175 R3.1
NetCON5_A5: CON5.A5 R64.1
NetCON5_B5: CON5.B5 R65.1
NetCON6_1: CON6.1 J3.2 U9.3
NetCON7_9: CON7.9 R85.2
NetCON12_11: CON12.11 R180.2
NetCON12_14: CON12.14 R186.2
NetCON13_9: CON13.9 R233.2
NetCON13_12: CON13.12 R230.2
NetCON18_C2: CON18.C2 R280.1 U48.1
NetCON18_C3: CON18.C3 R283.1 U48.3
NetCON18_C6: CON18.C6 FB17.2
NetCON18_C7: CON18.C7 R282.2 U48.4
NetCON19_1: CON19.1 R284.1
NetCON19_6: CON19.6 R285.2 R288.2
NetCON19_21: CON19.21 R287.1
NetCON19_23: CON19.23 R279.2
NetCON19_36: CON19.36 R295.2
NetCON19_41: CON19.41 R297.2
NetCON19_43: CON19.43 R298.2
NetCON19_52: CON19.52 R300.2 R303.2
NetCON19_53: CON19.53 R304.1 R309.2
NetCON19_55: CON19.55 R306.1 R308.2
NetCON19_69: CON19.69 R310.1
NetCON19_75: CON19.75 R311.1
NetD1_1: D1.1 D1.3 Q2.5 Q2.6 Q2.7 Q2.8 R23.2 R25.2
NetD2_2: D2.2 F1.2 Q1.5 Q1.6 Q1.7 Q1.8
NetD8_2: D8.2 R72.2
NetD21_1: D21.1 R439.1
NetD22_2: D22.2 R394.2 U55.A5
NetJ3_1: J3.1 R72.1
NetJ4_3: J4.3 U10.7
NetL5_1: L5.1 U36.32
NetLED0_1: LED0.1 R20.2
NetLED1_2: LED1.2 R47.2
NetLED2_2: LED2.2 R49.2
NetLED4_1: LED4.1 R290.2
NetQ1_4: Q1.4 R16.1 R21.2
NetQ3_1: Q3.1 R23.1
NetQ3_3: Q3.3 R26.1
NetQ4_1: Q4.1 R43.1
NetQ4_3: Q4.3 R44.1
NetQ5_1: Q5.1 R50.1 R51.2
NetQ5_3: Q5.3 R47.1
NetQ6_1: Q6.1 R52.1 R53.2
NetQ6_3: Q6.3 R49.1
NetQ7_1: Q7.1 R95.2 R96.1
NetQ8_1: Q8.1 R97.2 R98.1
NetQ8_3: Q8.3 R96.2
NetQ9_1: Q9.1 R163.1 R165.2
NetQ9_3: Q9.3 R161.2 U33.4
NetQ12_1: Q12.1 R293.1 R296.1
NetQ14_1: Q14.1 R404.2
NetQ14_2: Q14.2 R405.1 R406.2
NetR24_1: R24.1 SW1.1
NetR27_2: R27.2 R33.2 U3.4
NetR30_1: R30.1 R34.2 U2.4
NetR35_1: R35.1 R41.2 U4.4
NetR37_2: R37.2 R39.2 U5.4
NetR75_2: R75.2 U9.7
NetR84_1: R84.1 U11.15
NetR117_1: R117.1 R123.2 U23.12
NetR119_1: R119.1 U23.2
NetR119_2: R119.2 U24.2
NetR120_1: R120.1 U23.1
NetR120_2: R120.2 U24.3
NetR122_2: R122.2 U23.15
NetR125_1: R125.1 R131.2 U26.12
NetR127_1: R127.1 U26.2
NetR127_2: R127.2 U27.2
NetR128_1: R128.1 U26.1
NetR128_2: R128.2 U27.3
NetR130_2: R130.2 U26.15
NetR133_2: R133.2 U30.14
NetR134_2: R134.2 U30.28
NetR135_1: R135.1 U30.17
NetR139_1: R139.1 U30.25
NetR140_1: R140.1 U30.24
NetR141_1: R141.1 U30.20
NetR142_1: R142.1 U30.19
NetR143_1: R143.1 U30.8
NetR144_1: R144.1 U30.23
NetR145_2: R145.2 R146.1 U30.22
NetR147_2: R147.2 U31.14
NetR148_2: R148.2 U31.28
NetR149_1: R149.1 U31.17
NetR152_1: R152.1 U31.25
NetR154_1: R154.1 U31.24
NetR155_1: R155.1 U31.20
NetR156_1: R156.1 U31.19
NetR157_1: R157.1 U31.8
NetR158_1: R158.1 U31.23
NetR159_2: R159.2 R160.1 U31.22
NetR162_1: R162.1 U33.3
NetR170_2: R170.2 U35.11
NetR171_1: R171.1 U35.4
NetR172_1: R172.1 U35.6
NetR173_1: R173.1 U36.34
NetR192_2: R192.2 U36.48
NetR219_1: R219.1 U40.1
NetR313_1: R313.1 R316.2 U49.4
NetR395_2: R395.2 U55.A6
NetR399_2: R399.2 U56.13
NetR402_1: R402.1 U57.5
NetR403_1: R403.1 U57.4
NetR409_2: R409.2 R411.2 U61.23
NetR410_2: R410.2 R412.2 U61.22
NetTP9_1: TP9.1 U36.33
NetTP10_1: TP10.1 U36.44
nSRST: CON8.15 R90.2
P2/GPIO3_C7_d/CAN2_nINT/3V3: CON0.144 R131.1
P3/UART4_RTSN_M0/RS485_RD/3V3: CON0.145 U21.4 U21.5
R1/UART4_RX_M0/RS485/3V3: CON0.140 R111.2 U21.3
R2/SPI2_MISO_M0/CAN/3V3: CON0.156 R122.1 R130.1
R3/UART4_TX_M0/RS485/3V3: CON0.141 U21.6
REFCLK: R396.2 U56.55
RESETn_ETH1/3V3: C179.1 R220.2 R221.2 U40.21
RK809_BLK/3V3: CON0.184 R11.2
RK809_HP_SNS: CON0.186
RK809_HPL_OUT: CON0.187
RK809_HPR_OUT: CON0.188
RK809_LRCK/3V3: CON0.183 R12.2
RK809_MCLK/3V3: CON0.185 R10.2
RK809_MIC1n: C3.1
RK809_MIC1p: C4.1
RK809_PDMCLK/3V3: CON0.116 R15.2
RK809_PWRON/PU/3V3: CON0.117 R48.1
RK809_SDI/3V3: CON0.182 R13.2
RK809_SDO/3V3: CON0.181 R14.2
RK809_SPK_OUTn: C1.1 FB1.2
RK809_SPK_OUTp: C2.1 FB2.2
RS232_RXD: CON9.2 U29.13
RS232_TXD: CON9.3 U29.14
RS485_A1: J7.3 R102.1
RS485_A2: J7.6 R114.1
RS485_B1: J7.2 R104.1
RS485_B2: J7.5 R115.1
RTCK: CON8.11 R93.1
S0: R66.2 R69.1 R76.1 U10.4
S1: R67.2 R70.1 U10.5
S2: R68.2 R71.1 U10.6
SCL: R398.2 U56.62
SD_CLK: CON0.109 CON7.5 R80.2 U12.6
SD_CMD: CON0.113 CON7.3 R81.2 U13.1
SD_D0: CON0.112 CON7.7 R79.2 U12.4
SD_D1: CON0.111 CON7.8 R78.2 U12.3
SD_D2: CON7.1 R83.2 U11.2 U13.4
SD_D3: CON7.2 R82.2 U11.5 U13.3
SD_DET: CON0.95 R77.2 R85.1 U11.1 U12.1
SDA: R397.2 U56.61
SDC_CD/3V3: J15.10 R444.2 U65.1
SDC_CLK: J15.8 R3.2 U65.4
SDC_CMD/3V3: CON0.176 J15.7 U65.3
SDC_D0/3V3: CON0.171 J15.3 U64.3
SDC_D1/3V3: CON0.172 J15.4 U64.4
SDC_D2/3V3: CON0.173 J15.5 U64.6
SDC_D3/3V3: CON0.174 J15.6 U64.1
SDC_WAKE_HOST/3V3: CON0.124 J15.9 R169.2 R172.2 U65.6
SIM_CLK: C251.2 CON19.32 R283.2 R292.2
SIM_CLK_4G: R292.1
SIM_DAT: C250.2 CON19.34 R281.2 R282.1 R294.2
SIM_DAT_4G: R294.1
SIM_RST: C252.2 CON19.30 R280.2 R291.2
SIM_RST_4G: R291.1
SPK_OUTn: CON0.178 FB1.1
SPK_OUTp: CON0.177 FB2.1
T2/GPIO4_B1_d/EVM_LED1/3V3: CON0.137 R50.2
T3/SPI2_MOSI_M0/CAN/3V3: C105.1 R2.2 U23.14 U26.14
TCK: CON8.9 R94.1 U11.3 U14.1
TDI: CON8.5 R87.2 U14.6
TDO: CON8.13 R89.2 U14.3
TMS: CON8.7 R88.2 U11.6 U14.4
TRSN: CON8.3 R86.2
TX0_CLK+: CON24.10 U56.22 U58.2 U58.9
TX0_CLK-: CON24.12 U56.21 U58.1 U58.10
TX0_D0+: CON24.7 U56.25 U60.4 U60.7
TX0_D0-: CON24.9 U56.24 U60.5 U60.6
TX0_D1+: CON24.4 U56.28 U58.5 U58.6
TX0_D1-: CON24.6 U56.27 U58.4 U58.7
TX0_D2+: CON24.1 U56.31 U60.1 U60.10
TX0_D2-: CON24.3 U56.30 U60.2 U60.9
TX0_HPD: CON24.19 R404.1 R407.2 U59.2 U59.9
Tx_HPD: R405.2 U56.14
TXC_INPUT_MODE0: R235.1 R238.1 U40.12
U1/GPIO4_B7_d/EVM_LED2/3V3: CON0.138 R52.2
U2/RGMII_RXCLK_M0/3V3: CON0.12 R191.1
UART_VBUS: CON5.A4 CON5.A9 CON5.B4 CON5.B9 FB3.2 U8.3
USB0_CC1: CON11.A5 D10.1 R168.2 U34.3 U35.1
USB0_CC2: CON11.B5 R168.1 U34.4 U35.2
USB0_VBUS: C138.1 C139.1 C140.1 CON11.A4 CON11.A9 CON11.B4 CON11.B9 R164.2 R171.2 U33.1 U34.5
USBDM: R63.1 U7.7
USBDP: R62.1 U7.6
V2/RGMII_RXDV_M0/3V3: CON0.11 R190.1
V3/GPIO4_B0_d/MIPI_LVDS_CAP_TS_nINT/3V3: CON0.134
V27/RMII_RXDV_CRS/3V3: CON0.105 U40.26
VCCA_1V8_HDMIPLL: C324.1 C325.1 C333.2 FB25.2 U56.34
VCCA_1V8_HDMITX: C322.1 C323.1 FB26.2 U56.26
VCCA_1V8_LVDSPLL: C320.1 C321.1 FB22.2 U56.52
VCCA_1V8_LVDSTX: C319.1 C326.1 FB24.2 U56.41
VCCA_1V8_MIPIRX: C312.1 C313.1 FB21.2 U56.5
VCCA_1V8_SYSCLK: C314.1 C315.1 FB23.2 U56.50
VDD_1V2_A0L: C154.1 C155.1 C156.1 R209.2 U36.4 U36.9 U36.47
VDD_1V2_ETH0L: C150.1 C151.1 L5.2 R208.1 R209.1
VDD_1V2_L0L: C157.1 C158.1 R208.2 U36.22
VDD_1V8: C308.1 C309.1 C310.1 C311.1 FB20.2 FB28.1 R392.2 U56.18 U56.33 U56.57
VDD_1V8_MAIN: C48.1 C49.1 C50.1 C316.1 C317.1 C318.1 C329.1 C340.2 FB20.1 FB21.1 FB22.1 FB23.1 FB24.1 FB25.1 FB26.1 L4.2 Q14.3 R38.2 R167.1 R390.2 R391.2 R419.2 TP8.1 U54.3 U54.6
VDD_1V8_SIM: C249.1 C253.1 CON18.C1 FB17.1 R281.1 R295.1 U48.5
VDD_3V3_ACODEC: C107.2 C108.2 CON0.180 R299.1 R300.1 R301.1 U29.16
VDD_3V3_DRG0: C163.1 C164.1 R196.2 R198.2 R200.2 R201.2 R202.2 R203.2 R205.2 U36.29
VDD_3V3_ETH0: C152.1 C165.1 C166.1 D11.1 R173.2 R174.1 R179.1 R193.1 R194.2 R195.2 R196.1 R197.1 R199.2 R204.1 R206.2 R207.2 U39.5
VDD_3V3_ETH0A: C159.1 C160.1 R204.2 U36.1 U36.12
VDD_3V3_ETH1: C172.1 C173.1 C174.1 FB13.2 R221.1 R222.1 R223.1 R224.1 R225.1 R226.1 R227.2 R228.2 R229.2 R234.2 R235.2 R236.2 U40.14
VDD_3V3_JTAG: C73.1 C74.1 CON8.1 CON8.2 D25.1 R86.1 R87.1 R88.1 R89.1 R90.1 U14.5
VDD_3V3_MAIN: C40.2 C41.1 C42.1 C43.1 C77.1 C78.1 C85.1 C86.1 C89.1 C90.1 C99.1 C100.1 C243.2 C331.1 C334.1 C336.1 C337.1 D8.1 D25.2 FB5.2 FB7.2 FB8.2 FB10.2 FB11.2 FB13.1 FB14.1 FB27.1 J15.1 L3.2 LED1.1 LED2.1 Q4.2 R4.2 R5.2 R6.2 R7.2 R36.2 R57.2 R73.1 R74.1 R99.1 R111.1 R117.2 R118.2 R125.2 R126.2 R137.2 R139.2 R140.2 R141.2 R142.2 R145.1 R151.2 R152.2 R154.2 R155.2 R156.2 R159.1 R161.1 R162.2 R169.1 R195.1 R279.1 R288.1 R408.1 R409.1 R410.1 R413.1 R415.2 R440.2 R446.1 TP7.1 U15.1 U21.1 U23.18 U24.1 U26.18 U27.1 U54.7 U57.3 U57.6 U61.24 U64.5 U65.5 U66.5
VDD_3V3_PCIE: C244.1 C245.1 C246.1 C247.1 C248.1 C258.1 C259.1 C260.1 C261.1 C262.1 C267.2 C268.1 C269.1 C270.1 CON19.2 CON19.4 CON19.70 CON19.72 CON19.74 L8.2 R290.1 R314.2
VDD_3V3_REG0: C161.1 C162.1 R197.2 U36.30 U36.31
VDD_3V3_SOM: C5.2 C6.2 C7.1 C18.1 C19.1 CON0.77 CON0.78 CON0.79 CON0.80 CON4.4 CON4.5 F2.2 TP5.1
VDD_3V3_SOM_OUT: C58.1 C66.1 C70.1 C71.1 C72.1 CON0.120 CON7.4 R30.2 R35.2 R37.1 R43.2 R66.1 R67.1 R68.1 R77.1 R78.1 R79.1 R80.1 R81.1 R82.1 R83.1 R313.2 U6.3 U6.6 U10.8 U11.16
VDD_5V_HDMICONN: C335.1 CON24.18 D20.1 R400.2 R401.2 U57.7
VDD_5V_HUB: C124.1 C125.1 C126.1 CON10.1 CON10.5 FB9.2 U32.5
VDD_5V_ISO: C91.1 C97.1 C98.1 C101.1 MK1.4 R100.1 R112.1 U15.16 U21.16 U24.8 U27.8
VDD_5V_MAIN: C16.1 C17.1 C22.2 C33.1 C34.1 C35.1 C95.1 C96.1 C142.1 CON4.7 D20.2 FB4.2 FB9.1 L2.2 MK1.2 R29.2 R136.2 R150.2 TP6.1 U33.5 U35.12
VDD_5V_UART: C59.1 C61.1 C62.1 C63.2 FB3.1 U6.7 U7.19
VDD_12V_IN: CON2.1 CON3.1 F1.1 R19.2
VDD_12V_MAIN: C11.1 C13.1 C23.1 C24.1 C26.1 C30.1 C31.1 C32.1 C37.1 C38.1 C39.1 C44.1 C46.1 C47.1 C264.1 C265.1 C266.1 CON4.8 D1.2 FB6.1 Q3.2 R20.1 R27.1 U2.5 U3.5 U4.5 U5.5 U49.5
VFFE_VIO_1V8: CON19.65
W1/RGMII_RXD1_M0/3V3: CON0.9 R187.1
W2/RGMII_RXD2_M0/3V3: CON0.8 R188.1
W3/RGMII_RXD0_M0/3V3: CON0.7 R185.1
W25/GPIO2_A1_d/TOUCH_INTn/3V3: CON0.71
W26/RMII_CLK/3V3: CON0.107 U40.15
WAKE: CON19.54 R301.2 R305.2
XL9555_A0: R413.2 R414.1 U61.21
XL9555_P00/WDI/3V3: U10.1 U61.4
XL9555_P01/WD_SET/3V3: R76.2 U61.5
XL9555_P02/4G_nRST/5G_RSTn/3V3: Q13.1 R312.1 U61.6
XL9555_P03/USB-DRVVBUS/3V3: R163.2 U61.7
XL9555_P04/CAM_PWDN0/3V3: U61.8
XL9555_P05/CAM_PWDN1/3V3: U61.9
XL9555_P06/CAM_PWDN2/3V3: U61.10
XL9555_P07/CAM_PWDN3/3V3: U61.11
XL9555_P10/RGMII_RST/3V3: R193.2 U39.1 U61.13
XL9555_P11/RMII_RST/3V3: R220.1 U61.14
XL9555_P12/CAN_nRST/3V3: R124.1 R132.1 U61.15
XL9555_P13/ETH_PWRON/3V3: U61.16
XL9555_P14/SDIO_EN/KEYB_PWROFFn/LVDS_DEN/DEVSLP/3V3: R285.1 R293.2 R444.1 U61.17
XL9555_P15/MIPI_LVDS_CAP_TS_RST/3V3: U61.18
XL9555_P16/MIPI_LCD_RST/HDMI_nRST/3V3: R439.2 U61.19
XL9555_P17/HDMI_EN/3V3: D22.1 U61.20
XTALI: C328.2 R393.1 U56.53 Y11.3
XTALO: C327.2 R393.2 U56.54 Y11.1
Y2/RGMII_TXCLK_M0/3V3: CON0.1 U36.21
Y3/RGMII_RXD3_M0/3V3: CON0.10 R189.1
Y25/RMII_TXD0/3V3: CON0.104 U40.16
Y26/RMII_TXD1/3V3: CON0.106 U40.17
Y27/RMII_RXD0/3V3: CON0.101 U40.9
pads on no net: CON0. CON3.3 CON5. CON5.A8 CON5.B8 CON7. CON9.1 CON9.4 CON9.6 CON9.7 CON9.8 CON9.9 CON11. CON11.A8 CON11.B8 CON12.15 CON12.16 CON13.13 CON13.14 CON19. CON19.8 CON19.20 CON19.22 CON19.24 CON19.25 CON19.26 CON19.28 CON19.29 CON19.31 CON19.35 CON19.37 CON19.40 CON19.42 CON19.44 CON19.46 CON19.48 CON19.56 CON19.58 CON19.59 CON19.60 CON19.61 CON19.62 CON19.63 CON19.64 CON19.66 CON19.68 CON19.76 CON19.77 CON19.78 CON19.79 CON19.80 CON24. CON24.13 CON24.14 H5.1 H6.1 J4.1 J5.1 J6.1 J6.2 J6.4 J6.5 J15.11 J15.12 SW1.3 SW1.4 SW1.5 U7.1 U7.2 U7.11 U7.12 U7.13 U7.14 U7.15 U7.16 U7.17 U7.18 U7.20 U8.1 U8.5 U10.3 U11.9 U11.10 U11.11 U11.12 U11.13 U11.14 U12.5 U13.5 U13.6 U15.11 U15.14 U21.11 U21.14 U23.3 U23.4 U23.5 U23.6 U23.10 U23.11 U26.3 U26.4 U26.5 U26.6 U26.10 U26.11 U29.7 U29.8 U29.9 U29.10 U30.18 U30.26 U31.18 U31.26 U35.3 U36.38 U36.39 U36.40 U36.41 U36.42 U36.43 U40.11 U40.13 U40.18 U40.19 U40.27 U40.30 U48.6 U55.A3 U55.A4 U55.B3 U55.B4 U55.C3 U55.C4 U55.D3 U55.D4 U55.E3 U55.E4 U55.F3 U55.F4 U56.15 U56.16 U56.19 U56.20 U56.37 U56.38 U56.39 U56.40 U56.43 U56.44 U56.45 U56.46 U56.47 U56.48 U56.58 U56.59 U56.60 U56.63 U59.5 U59.6 U66.1

## Polygon pours and split planes (outlines as drawn)
no net on Top Layer "NONET_L01_P000" (solid, pour order 0): 1800,2475

## Keep-outs
Keep-Out Layer:
  lines w10: 7330,5225 7340,5215 ; 7340,10 7345,5

## Silkscreen, mask and mechanical layers (free items; w line width, h text height)
Mechanical 1:
  lines w10: 6390,990 6390,990 ; 6390,990 1075,990 1075,4720 6390,4720 6390,4240 6390,3875 6390,3650 6390,3580 6390,990

## Text inside footprints (layer, text, board x,y; h text height)
C248: Top Overlay "+" at 26620,15335 h40 r90